# Altium PCB JLC_output.pcbdoc
Units mil, origin at the board's own origin, x right, y up, seen from the top; angles counter-clockwise.
Board outline 3167.4 x 2980 mil, 2 copper layers (Top Layer, Bottom Layer), stack 62.2 mil thick; 55 components, 65 nets, 221 pads, 30 vias.
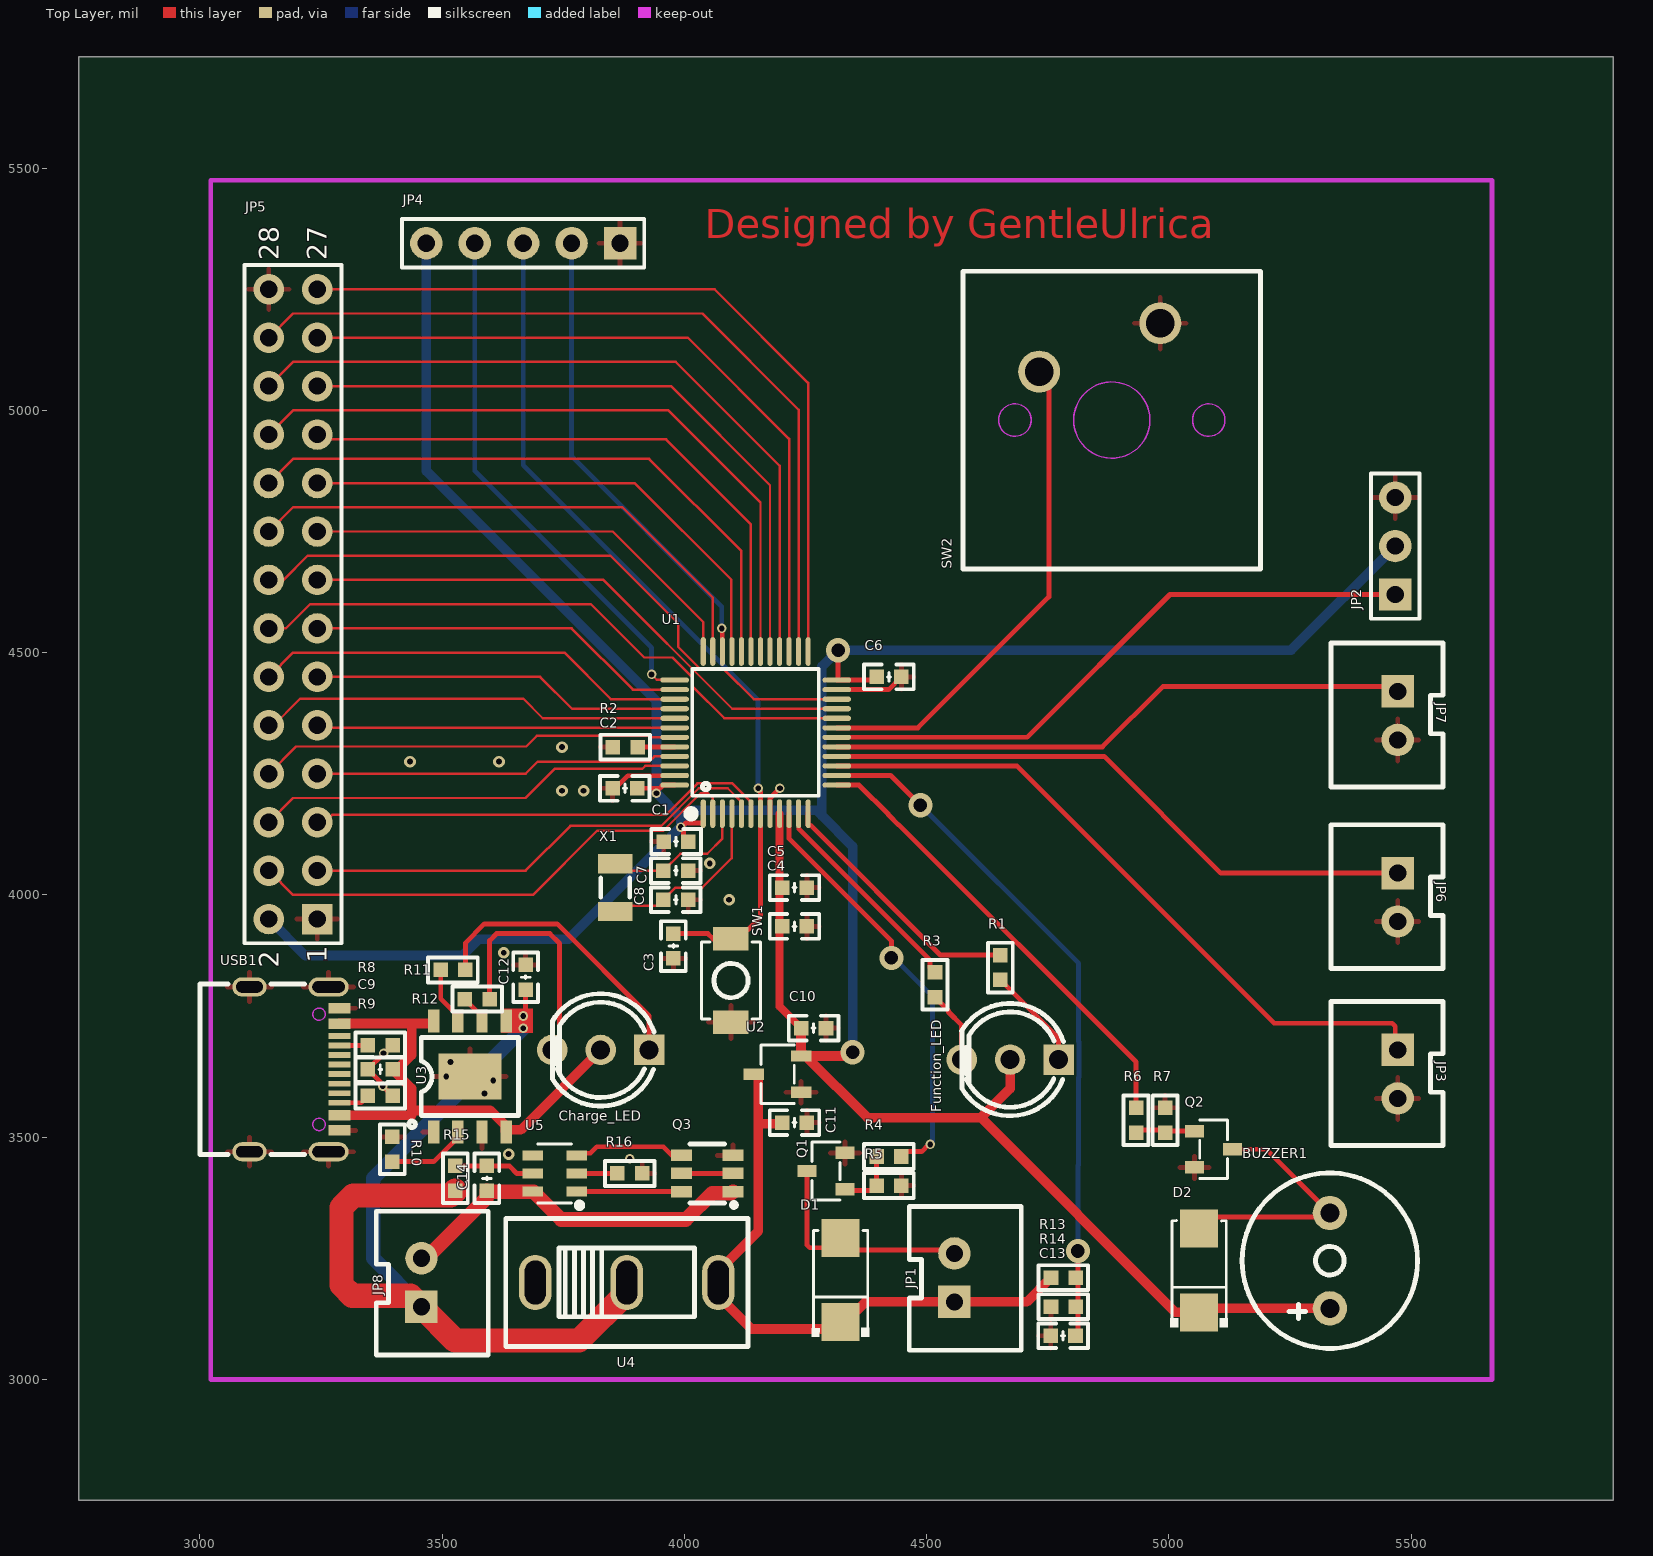
[diagram p0: Top Layer view]
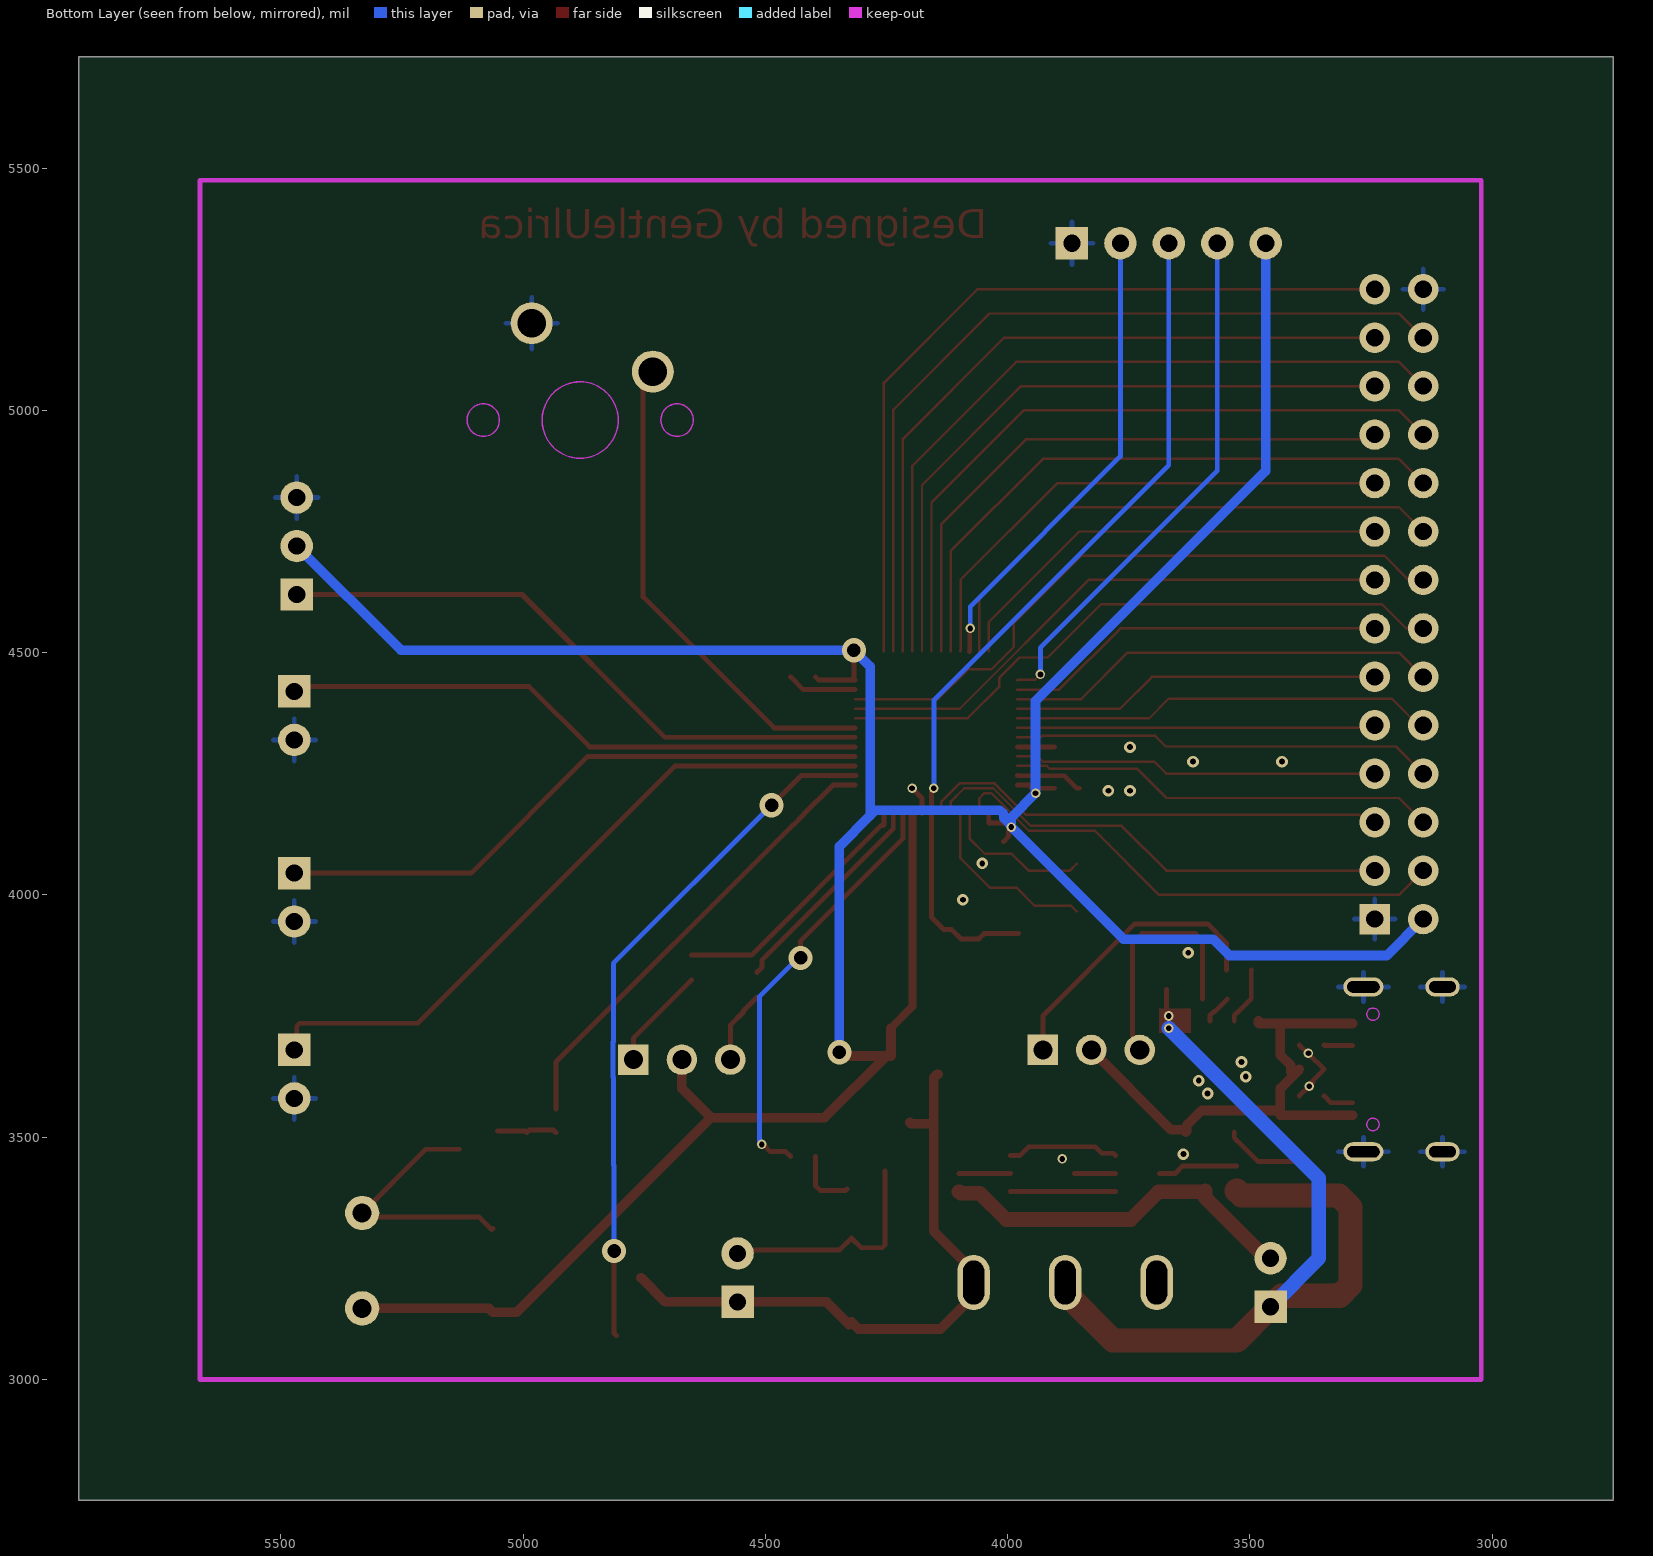
[diagram p1: Bottom Layer view, seen from below]

## Layer stack, top to bottom
Top Solder Mask Layer: solder mask 0.4, Dk 3.3
Top Layer: signal copper 1.4
Dielectric1: surface 59.4, FR4, Dk 4.5
Bottom Layer: signal copper 1.4
Bottom Solder Mask Layer: solder mask 0.4, Dk 3.3

## Board outline
5917.4,2750 2750,2750 2750,5730 5917.4,5730

## Design rules (kind name [scope] priority, off if disabled: settings)
BoardOutlineClearance copperThickness1oz [All] p0: genericclearance=10 ignorepadtopadclearanceinfootprint=FALSE except(0: Arc-SplitContinuation Track-SplitContinuation SMDPad-SplitContinuation THPad-SplitContinuation Via-SplitContinuation Fill-SplitContinuation Poly-SplitContinuation Region-SplitContinuation Text-SplitContinuation)
BoardOutlineClearance copperThickness2oz [All] p0: genericclearance=10 ignorepadtopadclearanceinfootprint=FALSE except(0: Arc-SplitContinuation Track-SplitContinuation SMDPad-SplitContinuation THPad-SplitContinuation Via-SplitContinuation Fill-SplitContinuation Poly-SplitContinuation Region-SplitContinuation Text-SplitContinuation)
BoardOutlineClearance otherClearance [All] p0: genericclearance=10 ignorepadtopadclearanceinfootprint=FALSE except(0: Arc-SplitContinuation Track-SplitContinuation SMDPad-SplitContinuation THPad-SplitContinuation Via-SplitContinuation Fill-SplitContinuation Poly-SplitContinuation Region-SplitContinuation Text-SplitContinuation)
Clearance copperThickness1oz [All] p1: gap=7 ignorepadtopadclearanceinfootprint=FALSE
Clearance copperThickness2oz [All] p1: gap=7 ignorepadtopadclearanceinfootprint=FALSE
Clearance otherClearance [All] p1: gap=7 ignorepadtopadclearanceinfootprint=FALSE
DiffPairsRouting differentialPair [All] p1: maxuncoupledlength=10 minlimit=6 maxlimit=Infinity mostfreqgap=6 toplayer_minwidth=5 toplayer_prefwidth=10 toplayer_maxwidth=100 bottomlayer_minwidth=5 bottomlayer_prefwidth=10 bottomlayer_maxwidth=100
PasteMaskExpansion pasteMaskExpansion [All] p1: expansion=0
PlaneConnect innerPlane [All] p1: planeconnectstyle=Relief reliefexpansion=20 reliefentries=4 reliefconductorwidth=10 reliefairgap=10
PolygonConnect copperRegion [All] p1: connectstyle=Relief reliefentries=4 reliefconductorwidth=10 polygonreliefangle="90 Angle" airgapwidth=10
RoutingVias viaSize [All] p1: viastyle="Through Hole" holewidth=12.0078 minholewidth=11.811 maxholewidth=248.0314 width=12.0078 minwidth=11.811 maxwidth=248.0314
SolderMaskExpansion solderMaskExpansion [IsVia] p1: useseparateexpansions=TRUE expansion=-1000 expansionbottom=-1000
SolderMaskExpansion solderMaskExpansion [All] p2: useseparateexpansions=TRUE expansion=2 expansionbottom=2
Width copperThickness1oz [All] p1: maxlimit=100 minlimit=5 preferedwidth=10
Width copperThickness2oz [All] p1: maxlimit=100 minlimit=8 preferedwidth=10

## Components (designator, comment, footprint, x,y, rotation, side; value= is the part's Value field where it differs from the comment)
BUZZER1 "hnb09a03" BUZ-TH_BD9.0-P5.00-D0.6-FD 5332.4,3245 r90 top
C1 "4.7uF" "C 0603_L"#1 3983,4110 r0 top
C2 "100nF" "C 0603_L"#2 3877.4,4220 r180 top
C3 "100nF" "C 0603_L"#2 3977.4,3894.4 r90 top
C4 "1uF" "C 0603_L"#2 4227.4,3935 r180 top
C5 "10nF" "C 0603_L"#2 4227.4,4015 r180 top
C6 "100nF" "C 0603_L"#2 4422.4,4450 r180 top
C7 "DNP" "C 0603_L"#2 3982.4,4050 r180 top
C8 "DNP" "C 0603_L"#2 3982.4,3990 r180 top
C9 "10uF" "C 0603_L"#2 3372.4,3640 r0 top
C10 "1uF" "C 0603_L"#2 4266.8,3725 r180 top
C11 "1uF" "C 0603_L"#2 4227.4,3530 r180 top
C12 "10uF" "C 0603_L"#2 3672.4,3830 r270 top
C13 "100nF" "C 0603_L"#2 4781.8,3090 r0 top
C14 "100nF" "C 0603_L"#2 3592.4,3415 r270 top
Charge_LED "tj-l5fytxhtcylc2r2g-a5" LED-TH_3P-BD5.9-P2.54-BI 3827.4,3680 r180 top
D1 "ss14_c83852" SMA_L4.3-W2.6-LS5.2-RD 4322.4,3205 r90 top
D2 "ss14_c83852" SMA_L4.3-W2.6-LS5.2-RD 5062.4,3225 r90 top
Function_LED "tj-l5fytxhtcylc2r2g-a5" LED-TH_3P-BD5.9-P2.54-BI 4672.4,3660 r180 top
JP1 "HDR-1X2" XH2.54-LI-2P 4557.4,3210 r90 top
JP2 "HDR-1X3" HDR2.54-LI-3P 5467.4,4720 r90 top
JP3 "HDR-1X2" XH2.54-LI-2P 5472.4,3630 r270 top
JP4 "HDR-1X5" HDR2.54-LI-5P 3667.4,5345 r180 top
JP5 "Header 2X11" HDR2.54-LI-2x14P 3192.4,4600 r90 top
JP6 "HDR-1X2" XH2.54-LI-2P 5472.4,3995 r270 top
JP7 "HDR-1X2" XH2.54-LI-2P 5472.4,4370 r270 top
JP8 "HDR-1X2" XH2.54-LI-2P 3457.4,3200 r90 top
Q1 "ao3400a_c347475" SOT-23-3_L2.9-W1.3-P1.90-LS2.4-BR#1 4292.4,3430 r0 top
Q2 "ao3400a_c347475" SOT-23-3_L2.9-W1.3-P1.90-LS2.4-BR#2 5092.4,3475 r180 top
Q3 "fs8205a" SOT-23-6_L2.9-W1.6-P0.95-LS2.8-BR 4047.4,3425 r0 top
R1 "1K" "R 0603_L"#1 4652.4,3850 r90 top
R2 "10K" "R 0603_L"#2 3878,4305 r180 top
R3 "1K" "R 0603_L"#1 4517.4,3814.4 r90 top
R4 "100" "R 0603_L"#1 4422.4,3460 r180 top
R5 "10K" "R 0603_L"#1 4422.4,3400 r180 top
R6 "100" "R 0603_L"#1 4932.4,3535 r90 top
R7 "10K" "R 0603_L"#1 4992.4,3535 r270 top
R8 "5.1K" "R 0603_L"#1 3372.4,3690 r180 top
R9 "5.1K" "R 0603_L"#1 3372.4,3585 r180 top
R10 "2.4K" "R 0603_L"#1 3397.4,3475 r270 top
R11 "2.2K" "R 0603_L"#1 3522.4,3845 r180 top
R12 "2.2K" "R 0603_L"#1 3572.4,3785 r180 top
R13 "1M" "R 0603_L"#1 4782.4,3210 r180 top
R14 "1M" "R 0603_L"#1 4782.4,3150 r0 top
R15 "100" "R 0603_L"#1 3527.4,3415 r90 top
R16 "1K" "R 0603_L"#1 3887.4,3425 r180 top
SW1 "ts-1088-ar02016" SW-SMD_L3.9-W3.0-P4.45 4096.3,3823.2 r90 top
SW2 "mx1a-11nw" SW-TH_MX1A-11NW 4857.4,5130 r0 top
U1 "stm32f031c6t6" LQFP-48_L7.0-W7.0-P0.50-LS9.0-BL 4147.4,4335 r0 top locked
U2 "xc6206p332mr-g_c5446" SOT-23-3_L2.9-W1.6-P1.90-LS2.8-BR 4192.4,3630 r0 top
U3 "tp4056_c382139" ESOP-8_L4.9-W3.9-P1.27-LS6.0-BL-EP 3557.4,3625 r0 top
U4 "hx ss12d10g5" SW-TH_3P-P4.80-HX-SS12D10G4 3881.3,3200 r0 top
U5 "dw01a_c351410" SOT-23-6_L2.9-W1.6-P0.95-LS2.8-BL 3732.4,3425 r90 top
USB1 "typec-16p_c53207138" USB-C-SMD_TYPEC-16P_C53207138 3195.4,3639.9 r270 top
X1 "q13fc13500004_c32346" FC-135R_L3.2-W1.5 3857.4,4015 r270 top

## Footprints (in the part's own frame and the unit in brackets; to place one, negate y for a bottom-side part, rotate by r counter-clockwise, add the part's x,y. Pads: shape width x height; smd on the part's side, far side on the other; paste and mask are expansions set on the pad)
BUZ-TH_BD9.0-P5.00-D0.6-FD [mil]
  round 70.9 hole 39.4: 1(-98.4,0) 2(98.4,0)
  silkscreen extent -181,-181 181,181
"C 0603_L"#1 [mil]
  rect 30x30 smd: 1(-25.6,0) 2(25.5,0)
  silkscreen extent -51,-26 51,26
"C 0603_L"#2 [mil]
  rect 30x30 smd: 1(-25.6,0) 2(25.6,0)
  silkscreen extent -51,-26 51,26
ESOP-8_L4.9-W3.9-P1.27-LS6.0-BL-EP [mil]
  rect 23.6x47.2 smd: 1(-75,-114.5) 2(-25,-114.5) 3(25,-114.5) 4(75,-114.5) 5(75,114.5) 6(25,114.5) 7(-25,114.5) 8(-75,114.5)
  rect 129.9x94.5 smd: 9(0,0)
  silkscreen extent -126,-105 100,81
FC-135R_L3.2-W1.5 [mil]
  rect 39.4x70.9 smd: 1(-49.2,0) 2(49.2,0)
  silkscreen extent -20,-30 20,30
HDR2.54-LI-2x14P [mil]
  rect 63x63 hole 35.4: 1(-650,-50)
  round 63 hole 35.4: 2(-650,50) 3(-550,-50) 4(-550,50) 5(-450,-50) 6(-450,50) 7(-350,-50) 8(-350,50) 9(-250,-50) 10(-250,50) 11(-150,-50) 12(-150,50) 13(-50,-50) 14(-50,50) 15(50,-50) 16(50,50) 17(150,-50) 18(150,50) 19(250,-50) 20(250,50) 21(350,-50) 22(350,50) 23(450,-50) 24(450,50) 25(550,-50) 26(550,50) 27(650,-50) 28(650,50)
  silkscreen extent -700,-100 700,100
HDR2.54-LI-3P [mil]
  rect 66.9x66.9 hole 35.4: 1(-100,0)
  round 66.9 hole 35.4: 2(0,0) 3(100,0)
  silkscreen extent -150,-50 150,50
HDR2.54-LI-5P [mil]
  rect 66.9x66.9 hole 35.4: 1(-200,0)
  round 66.9 hole 35.4: 2(-100,0) 3(0,0) 4(100,0) 5(200,0)
  silkscreen extent -250,-50 250,50
LED-TH_3P-BD5.9-P2.54-BI [mil]
  rect 63x63 hole 39.4: 1(-100,0)
  round 63 hole 39.4: 2(0,0) 3(100,0)
  silkscreen extent -110,-116 100,116
LQFP-48_L7.0-W7.0-P0.50-LS9.0-BL [mil]
  oval 10.6x59.1 smd paste+0 mask+2: 1(-108.3,-167.3) 2(-88.6,-167.3) 3(-68.9,-167.3) 4(-49.2,-167.3) 5(-29.6,-167.3) 6(-9.9,-167.3) 7(9.8,-167.3) 8(29.5,-167.3) 9(49.2,-167.3) 10(68.9,-167.3) 11(88.5,-167.3) 12(108.2,-167.3) 25(108.2,167.3) 26(88.5,167.3) 27(68.9,167.3) 28(49.2,167.3) 29(29.5,167.3) 30(9.8,167.3) 31(-9.9,167.3) 32(-29.6,167.3) 33(-49.2,167.3) 34(-68.9,167.3) 35(-88.6,167.3) 36(-108.3,167.3)
  oval 59.1x10.6 smd paste+0 mask+2: 13(167.3,-108.3) 14(167.3,-88.6) 15(167.3,-68.9) 16(167.3,-49.2) 17(167.3,-29.5) 18(167.3,-9.8) 19(167.3,9.8) 20(167.3,29.5) 21(167.3,49.2) 22(167.3,68.9) 23(167.3,88.6) 24(167.3,108.3) 37(-167.4,108.3) 38(-167.4,88.6) 39(-167.4,68.9) 40(-167.4,49.2) 41(-167.4,29.5) 42(-167.4,9.8) 43(-167.4,-9.8) 44(-167.4,-29.5) 45(-167.4,-49.2) 46(-167.4,-68.9) 47(-167.4,-88.6) 48(-167.4,-108.3)
  silkscreen extent -141,-176 130,132
"R 0603_L"#1 [mil]
  rect 30x30 smd: 1(-25.6,0) 2(25.6,0)
  silkscreen extent -51,-26 51,26
"R 0603_L"#2 [mil]
  rect 30x30 smd: 1(-25.5,0) 2(25.6,0)
  silkscreen extent -51,-26 51,26
SMA_L4.3-W2.6-LS5.2-RD [mil]
  rect 78.7x78.7 smd: 1(-86.6,0) 2(86.6,0)
  silkscreen extent -117,-59 102,59
SOT-23-3_L2.9-W1.3-P1.90-LS2.4-BR#1 [mil]
  rect 39.4x25.6 smd: 1(39.3,-37.4) 2(39.3,37.4) 3(-39.4,0)
  silkscreen extent -29,-60 29,60
SOT-23-3_L2.9-W1.3-P1.90-LS2.4-BR#2 [mil]
  rect 39.4x25.6 smd: 1(39.4,-37.4) 2(39.4,37.4) 3(-39.3,0)
  silkscreen extent -29,-60 29,60
SOT-23-3_L2.9-W1.6-P1.90-LS2.8-BR [mil]
  rect 42.1x23.6 smd: 1(48.6,-37.4) 2(48.6,37.4) 3(-48.7,0)
  silkscreen extent -34,-60 34,60
SOT-23-6_L2.9-W1.6-P0.95-LS2.8-BL [mil]
  rect 20.9x42.2 smd: 1(-37.4,-45.2) 2(0,-45.2) 3(37.4,-45.2) 4(37.4,45.3) 5(0,45.3) 6(-37.4,45.3)
  silkscreen extent -72,-57 61,35
SOT-23-6_L2.9-W1.6-P0.95-LS2.8-BR [mil]
  rect 43.3x23.6 smd paste+0 mask+2: 1(53.1,-37.4) 2(53.1,0) 3(53.1,37.4) 4(-53.2,37.4) 5(-53.2,0) 6(-53.2,-37.4)
  silkscreen extent -36,-70 60,61
SW-SMD_L3.9-W3.0-P4.45 [mil]
  rect 48.4x73.2 smd: 1(-86,0) 2(86,0)
  silkscreen extent -80,-61 80,61
SW-TH_3P-P4.80-HX-SS12D10G4 [mil]
  oval 66.9x114.2 hole 43.3 slot 90.6 at 90 deg paste-99999 mask+2: 1(-188.9,0) 2(0,0) 3(189,0)
  silkscreen extent -250,-132 250,132
SW-TH_MX1A-11NW [mil]
  round 86.6 hole 59.1 paste-99999 mask+2: 1(-125,-50) 2(125,50)
  Board Outline Layer circle w0.1: c25,-150 r78.7
  Board Outline Layer circle w0.1: c-175,-150 r33.5
  Board Outline Layer circle w0.1: c225,-150 r33.5
  Board Outline Layer lines w0.1: -208.5,-154.4 -206.3,-162.9 -201.8,-170.6 -195.6,-176.8 -188,-181.2 -179.4,-183.5 -170.6,-183.5 -162.1,-181.2 -154.5,-176.8 -148.2,-170.6 -143.8,-162.9 -141.5,-154.4 -141.5,-150 -141.5,-145.6 -143.8,-137.1 -148.2,-129.4 -154.5,-123.2 -162.1,-118.8 -170.6,-116.5 -179.4,-116.5 -188,-118.8 -195.6,-123.2 -201.8,-129.4 -206.3,-137.1 -208.5,-145.6 -208.5,-150 -208.5,-154.4 ; -53.7,-157.8 -50.7,-173 -44.8,-187.3 -36.2,-200.2 -25.2,-211.1 -12.3,-219.7 2,-225.7 17.2,-228.7 32.7,-228.7 47.9,-225.7 62.2,-219.7 75.1,-211.1 86.1,-200.2 94.7,-187.3 100.6,-173 103.7,-157.8 103.7,-150 103.7,-142.2 100.6,-127 94.7,-112.7 86.1,-99.8 75.1,-88.9 62.2,-80.3 47.9,-74.3 32.7,-71.3 17.2,-71.3 2,-74.3 -12.3,-80.3 -25.2,-88.9 -36.2,-99.8 -44.8,-112.7 -50.7,-127 -53.7,-142.2 -53.7,-150 -53.7,-157.8 ; 191.5,-154.4 193.7,-162.9 198.2,-170.6 204.4,-176.8 212,-181.2 220.6,-183.5 229.4,-183.5 237.9,-181.2 245.5,-176.8 251.8,-170.6 256.2,-162.9 258.5,-154.4 258.5,-150 258.5,-145.6 256.2,-137.1 251.8,-129.4 245.5,-123.2 237.9,-118.8 229.4,-116.5 220.6,-116.5 212,-118.8 204.4,-123.2 198.2,-129.4 193.7,-137.1 191.5,-145.6 191.5,-150 191.5,-154.4
  Board Outline Layer region: 103.7,-150 103.7,-157.8 100.6,-173 94.7,-187.3 86.1,-200.2 75.1,-211.1 62.2,-219.7 47.9,-225.7 32.7,-228.7 17.2,-228.7 2,-225.7 -12.3,-219.7 -25.2,-211.1 -36.2,-200.2 -44.8,-187.3 -50.7,-173 -53.7,-157.8 -53.7,-150 -53.7,-142.2 -50.7,-127 -44.8,-112.7 -36.2,-99.8 -25.2,-88.9 -12.3,-80.3 2,-74.3 17.2,-71.3 32.7,-71.3 47.9,-74.3 62.2,-80.3 75.1,-88.9 86.1,-99.8 94.7,-112.7 100.6,-127 103.7,-142.2
  Board Outline Layer region: 103.7,-150 103.7,-157.8 100.6,-173 94.7,-187.3 86.1,-200.2 75.1,-211.1 62.2,-219.7 47.9,-225.7 32.7,-228.7 17.2,-228.7 2,-225.7 -12.3,-219.7 -25.2,-211.1 -36.2,-200.2 -44.8,-187.3 -50.7,-173 -53.7,-157.8 -53.7,-150 -53.7,-142.2 -50.7,-127 -44.8,-112.7 -36.2,-99.8 -25.2,-88.9 -12.3,-80.3 2,-74.3 17.2,-71.3 32.7,-71.3 47.9,-74.3 62.2,-80.3 75.1,-88.9 86.1,-99.8 94.7,-112.7 100.6,-127 103.7,-142.2
  Board Outline Layer region: -141.5,-150 -141.5,-154.4 -143.8,-162.9 -148.2,-170.6 -154.5,-176.8 -162.1,-181.2 -170.6,-183.5 -179.4,-183.5 -188,-181.2 -195.6,-176.8 -201.8,-170.6 -206.3,-162.9 -208.5,-154.4 -208.5,-150 -208.5,-145.6 -206.3,-137.1 -201.8,-129.4 -195.6,-123.2 -188,-118.8 -179.4,-116.5 -170.6,-116.5 -162.1,-118.8 -154.5,-123.2 -148.2,-129.4 -143.8,-137.1 -141.5,-145.6
  Board Outline Layer region: -141.5,-150 -141.5,-154.4 -143.8,-162.9 -148.2,-170.6 -154.5,-176.8 -162.1,-181.2 -170.6,-183.5 -179.4,-183.5 -188,-181.2 -195.6,-176.8 -201.8,-170.6 -206.3,-162.9 -208.5,-154.4 -208.5,-150 -208.5,-145.6 -206.3,-137.1 -201.8,-129.4 -195.6,-123.2 -188,-118.8 -179.4,-116.5 -170.6,-116.5 -162.1,-118.8 -154.5,-123.2 -148.2,-129.4 -143.8,-137.1 -141.5,-145.6
  Board Outline Layer region: 258.5,-150 258.5,-154.4 256.2,-162.9 251.8,-170.6 245.5,-176.8 237.9,-181.2 229.4,-183.5 220.6,-183.5 212,-181.2 204.4,-176.8 198.2,-170.6 193.7,-162.9 191.5,-154.4 191.5,-150 191.5,-145.6 193.7,-137.1 198.2,-129.4 204.4,-123.2 212,-118.8 220.6,-116.5 229.4,-116.5 237.9,-118.8 245.5,-123.2 251.8,-129.4 256.2,-137.1 258.5,-145.6
  Board Outline Layer region: 258.5,-150 258.5,-154.4 256.2,-162.9 251.8,-170.6 245.5,-176.8 237.9,-181.2 229.4,-183.5 220.6,-183.5 212,-181.2 204.4,-176.8 198.2,-170.6 193.7,-162.9 191.5,-154.4 191.5,-150 191.5,-145.6 193.7,-137.1 198.2,-129.4 204.4,-123.2 212,-118.8 220.6,-116.5 229.4,-116.5 237.9,-118.8 245.5,-123.2 251.8,-129.4 256.2,-137.1 258.5,-145.6
  Board Outline Layer region: 103.7,-150 103.7,-157.8 100.6,-173 94.7,-187.3 86.1,-200.2 75.1,-211.1 62.2,-219.7 47.9,-225.7 32.7,-228.7 17.2,-228.7 2,-225.7 -12.3,-219.7 -25.2,-211.1 -36.2,-200.2 -44.8,-187.3 -50.7,-173 -53.7,-157.8 -53.7,-150 -53.7,-142.2 -50.7,-127 -44.8,-112.7 -36.2,-99.8 -25.2,-88.9 -12.3,-80.3 2,-74.3 17.2,-71.3 32.7,-71.3 47.9,-74.3 62.2,-80.3 75.1,-88.9 86.1,-99.8 94.7,-112.7 100.6,-127 103.7,-142.2
  Board Outline Layer region: -141.5,-150 -141.5,-154.4 -143.8,-162.9 -148.2,-170.6 -154.5,-176.8 -162.1,-181.2 -170.6,-183.5 -179.4,-183.5 -188,-181.2 -195.6,-176.8 -201.8,-170.6 -206.3,-162.9 -208.5,-154.4 -208.5,-150 -208.5,-145.6 -206.3,-137.1 -201.8,-129.4 -195.6,-123.2 -188,-118.8 -179.4,-116.5 -170.6,-116.5 -162.1,-118.8 -154.5,-123.2 -148.2,-129.4 -143.8,-137.1 -141.5,-145.6
  Board Outline Layer region: 258.5,-150 258.5,-154.4 256.2,-162.9 251.8,-170.6 245.5,-176.8 237.9,-181.2 229.4,-183.5 220.6,-183.5 212,-181.2 204.4,-176.8 198.2,-170.6 193.7,-162.9 191.5,-154.4 191.5,-150 191.5,-145.6 193.7,-137.1 198.2,-129.4 204.4,-123.2 212,-118.8 220.6,-116.5 229.4,-116.5 237.9,-118.8 245.5,-123.2 251.8,-129.4 256.2,-137.1 258.5,-145.6
  Board Outline Layer region: 103.7,-150 103.3,-157.7 102.2,-165.4 100.3,-172.9 97.7,-180.1 94.4,-187.1 90.4,-193.7 85.8,-200 80.6,-205.7 74.9,-210.9 68.7,-215.5 62.1,-219.4 55.1,-222.7 47.8,-225.3 40.3,-227.2 32.7,-228.4 25,-228.7 17.2,-228.4 9.6,-227.2 2.1,-225.3 -5.2,-222.7 -12.2,-219.4 -18.8,-215.5 -25,-210.9 -30.7,-205.7 -35.9,-200 -40.5,-193.7 -44.5,-187.1 -47.8,-180.1 -50.4,-172.9 -52.3,-165.4 -53.4,-157.7 -53.8,-150 -53.4,-142.3 -52.3,-134.6 -50.4,-127.1 -47.8,-119.9 -44.5,-112.9 -40.5,-106.3 -35.9,-100 -30.7,-94.3 -25,-89.1 -18.8,-84.5 -12.2,-80.6 -5.2,-77.3 2.1,-74.7 9.6,-72.8 17.2,-71.6 25,-71.3 32.7,-71.6 40.3,-72.8 47.8,-74.7 55.1,-77.3 62.1,-80.6 68.7,-84.5 74.9,-89.1 80.6,-94.3 85.8,-100 90.4,-106.3 94.4,-112.9 97.7,-119.9 100.3,-127.1 102.2,-134.6 103.3,-142.3
  Board Outline Layer region: -141.5,-150 -141.9,-155 -143,-159.9 -144.9,-164.5 -147.4,-168.9 -150.5,-172.8 -154.1,-176.2 -158.3,-179 -162.8,-181.2 -167.6,-182.7 -172.5,-183.4 -177.5,-183.4 -182.5,-182.7 -187.3,-181.2 -191.8,-179 -195.9,-176.2 -199.6,-172.8 -202.7,-168.9 -205.2,-164.5 -207,-159.9 -208.2,-155 -208.5,-150 -208.2,-145 -207,-140.1 -205.2,-135.5 -202.7,-131.1 -199.6,-127.2 -195.9,-123.8 -191.8,-121 -187.3,-118.8 -182.5,-117.3 -177.5,-116.6 -172.5,-116.6 -167.6,-117.3 -162.8,-118.8 -158.3,-121 -154.1,-123.8 -150.5,-127.2 -147.4,-131.1 -144.9,-135.5 -143,-140.1 -141.9,-145
  Board Outline Layer region: 258.5,-150 258.1,-155 257,-159.9 255.1,-164.5 252.6,-168.9 249.5,-172.8 245.9,-176.2 241.7,-179 237.2,-181.2 232.4,-182.7 227.5,-183.4 222.5,-183.4 217.5,-182.7 212.7,-181.2 208.2,-179 204.1,-176.2 200.4,-172.8 197.3,-168.9 194.8,-164.5 193,-159.9 191.8,-155 191.5,-150 191.8,-145 193,-140.1 194.8,-135.5 197.3,-131.1 200.4,-127.2 204.1,-123.8 208.2,-121 212.7,-118.8 217.5,-117.3 222.5,-116.6 227.5,-116.6 232.4,-117.3 237.2,-118.8 241.7,-121 245.9,-123.8 249.5,-127.2 252.6,-131.1 255.1,-135.5 257,-140.1 258.1,-145
  Board Outline Layer region: 103.7,-150 95.91,-184.15 74.07,-211.53 42.51,-226.73 7.49,-226.73 -24.07,-211.53 -45.91,-184.15 -53.7,-150 -53.8,-150 -45.91,-115.85 -24.07,-88.47 7.49,-73.27 42.51,-73.27 74.07,-88.47 95.91,-115.85 103.7,-150
  Board Outline Layer region: -141.5,-150 -144.82,-164.54 -154.11,-176.19 -167.55,-182.66 -182.45,-182.66 -195.89,-176.19 -205.18,-164.54 -208.5,-150 -208.5,-150 -205.18,-135.46 -195.89,-123.81 -182.45,-117.34 -167.55,-117.34 -154.11,-123.81 -144.82,-135.46 -141.5,-150
  Board Outline Layer region: 258.5,-150 255.18,-164.54 245.89,-176.19 232.45,-182.66 217.55,-182.66 204.11,-176.19 194.82,-164.54 191.5,-150 191.5,-150 194.82,-135.46 204.11,-123.81 217.55,-117.34 232.45,-117.34 245.89,-123.81 255.18,-135.46 258.5,-150
  silkscreen extent -282,-457 332,157
USB-C-SMD_TYPEC-16P_C53207138 [mil]
  oval 39.4x82.7 hole 23.6 slot 66.9 at 90 deg paste-99999 mask+2: 12(-170.1,70.3) 13(170.1,70.3)
  oval 39.4x70.9 hole 23.6 slot 55.1 at 90 deg paste-99999 mask+2: 14(-170.1,-93) 15(170.1,-93)
  rect 11.8x45.3 smd paste-3937 mask+2: A5(-49.2,93) A6(-9.9,93) A7(9.8,93) A8(49.2,93) B5(68.9,93) B6(29.5,93) B7(-29.6,93) B8(-68.9,93)
  rect 21.7x45.3 smd paste-3937 mask+2: A9B4(94.5,93) A12B1(126,93) B9A4(-94.5,93) B12A1(-126,93)
  Board Outline Layer circle w0.1: c-113.8,50.7 r12.8
  Board Outline Layer circle w0.1: c113.8,50.7 r12.8
  Board Outline Layer lines w0.1: 116.3,37.9 121,39.8 124.6,43.4 126.6,48.1 126.6,50.7 126.6,53.2 124.6,57.9 121,61.5 116.3,63.5 111.2,63.5 106.5,61.5 102.9,57.9 101,53.2 101,50.7 101,48.1 102.9,43.4 106.5,39.8 111.2,37.9 116.3,37.9 ; -111.3,37.9 -106.5,39.8 -102.9,43.4 -101,48.1 -101,50.7 -101,53.2 -102.9,57.9 -106.5,61.5 -111.3,63.5 -116.3,63.5 -121.1,61.5 -124.7,57.9 -126.6,53.2 -126.6,50.7 -126.6,48.1 -124.7,43.4 -121.1,39.8 -116.3,37.9 -111.3,37.9
  Board Outline Layer region: -101,50.7 -101,48.1 -102.9,43.4 -106.5,39.8 -111.3,37.9 -116.3,37.9 -121.1,39.8 -124.7,43.4 -126.6,48.1 -126.6,50.7 -126.6,53.2 -124.7,57.9 -121.1,61.5 -116.3,63.5 -111.3,63.5 -106.5,61.5 -102.9,57.9 -101,53.2
  Board Outline Layer region: -101,50.7 -101,48.1 -102.9,43.4 -106.5,39.8 -111.3,37.9 -116.3,37.9 -121.1,39.8 -124.7,43.4 -126.6,48.1 -126.6,50.7 -126.6,53.2 -124.7,57.9 -121.1,61.5 -116.3,63.5 -111.3,63.5 -106.5,61.5 -102.9,57.9 -101,53.2
  Board Outline Layer region: 126.6,50.7 126.6,48.1 124.6,43.4 121,39.8 116.3,37.9 111.2,37.9 106.5,39.8 102.9,43.4 101,48.1 101,50.7 101,53.2 102.9,57.9 106.5,61.5 111.2,63.5 116.3,63.5 121,61.5 124.6,57.9 126.6,53.2
  Board Outline Layer region: 126.6,50.7 126.6,48.1 124.6,43.4 121,39.8 116.3,37.9 111.2,37.9 106.5,39.8 102.9,43.4 101,48.1 101,50.7 101,53.2 102.9,57.9 106.5,61.5 111.2,63.5 116.3,63.5 121,61.5 124.6,57.9 126.6,53.2
  Board Outline Layer region: -101,50.7 -101,48.1 -102.9,43.4 -106.5,39.8 -111.3,37.9 -116.3,37.9 -121.1,39.8 -124.7,43.4 -126.6,48.1 -126.6,50.7 -126.6,53.2 -124.7,57.9 -121.1,61.5 -116.3,63.5 -111.3,63.5 -106.5,61.5 -102.9,57.9 -101,53.2
  Board Outline Layer region: 126.6,50.7 126.6,48.1 124.6,43.4 121,39.8 116.3,37.9 111.2,37.9 106.5,39.8 102.9,43.4 101,48.1 101,50.7 101,53.2 102.9,57.9 106.5,61.5 111.2,63.5 116.3,63.5 121,61.5 124.6,57.9 126.6,53.2
  Board Outline Layer region: -101,50.7 -101.4,47.6 -102.5,44.7 -104.2,42.2 -106.5,40.1 -109.3,38.7 -112.3,38 -115.3,38 -118.3,38.7 -121.1,40.1 -123.4,42.2 -125.1,44.7 -126.2,47.6 -126.6,50.7 -126.2,53.7 -125.1,56.6 -123.4,59.1 -121.1,61.2 -118.3,62.6 -115.3,63.4 -112.3,63.4 -109.3,62.6 -106.5,61.2 -104.2,59.1 -102.5,56.6 -101.4,53.7
  Board Outline Layer region: 126.6,50.7 126.2,47.6 125.1,44.7 123.3,42.2 121,40.1 118.3,38.7 115.3,38 112.2,38 109.2,38.7 106.5,40.1 104.2,42.2 102.4,44.7 101.3,47.6 101,50.7 101.3,53.7 102.4,56.6 104.2,59.1 106.5,61.2 109.2,62.6 112.2,63.4 115.3,63.4 118.3,62.6 121,61.2 123.3,59.1 125.1,56.6 126.2,53.7
  Board Outline Layer region: -113.8,63.5 -108.25,62.23 -103.79,58.68 -101.32,53.55 -101.32,47.85 -103.79,42.72 -108.25,39.17 -113.8,37.9 -113.8,37.9 -119.35,39.17 -123.81,42.72 -126.28,47.85 -126.28,53.55 -123.81,58.68 -119.35,62.23 -113.8,63.5
  Board Outline Layer region: 113.8,63.5 119.35,62.23 123.81,58.68 126.28,53.55 126.28,47.85 123.81,42.72 119.35,39.17 113.8,37.9 113.8,37.9 108.25,39.17 103.79,42.72 101.32,47.85 101.32,53.55 103.79,58.68 108.25,62.23 113.8,63.5
  silkscreen extent -176,-195 176,21
XH2.54-LI-2P [mil]
  rect 66.9x66.9 hole 35.4: 1(-50,0)
  round 66.9 hole 35.4: 2(50,0)
  silkscreen extent -150,-138 147,93

## Via types
v1: diameter 24, hole 12, Top Layer to Bottom Layer, 13 vias
v2: diameter 19.7, hole 11.8, Top Layer to Bottom Layer, 11 vias
v3: diameter 50, hole 28, Top Layer to Bottom Layer, 5 vias
v4: diameter 19.7, hole 12, Top Layer to Bottom Layer, 1 vias

## Nets (pads, with @x,y where several pads share a name; then routed paths per layer and width w, separated by ;. In a path a pad name is that pad's centre, name@x,y a point inside that pad or via, vN(x,y) a via of type N, cw(c..) or ccw(c..) an arc to the next point about the centre after c; other vN are vias at no path point)
3V3: BUZZER1.1 C1.2 C2.1 C4.2 C5.2 C6.2 C10.2 D2.1 Function_LED.2 JP2.2 JP4.5 JP5.2 U1.1 U1.9 U1.24 U1.48 U2.2 | length 7270.1
  Top Layer w10: C2.1 3948.9,4220 3955.7,4226.7 U1.48@3956,4226.7 ; v2(3942.4,4210) 3944.2,4211.9 3944.2,4214.9 U1.48@3956,4226.7 ; U1.48 U1.48@3956,4226.7 ; C1.2 3998.5,4120 3998.5,4131.2 3992.4,4137.4 v2(3992.4,4140) 3995,4140 4003.5,4148.5 4038.8,4148.5 4039.1,4148.8 U1.1 ; U1.24 U1.24@4317.1,4443.3 ; v3(4317.4,4505) 4317.4,4443.6 U1.24@4317.1,4443.3 ; C6.2 4390,4443.3 U1.24@4317.1,4443.3
  Top Layer w16: U1.9 4196.6,3769.6 C10.2
  Top Layer w20: C10.2 4241,3724.8 U2.2 4250.2,3667.4 4377.6,3540 4612.4,3540 ; U2.2@4250.2,3668.7 4251.5,3667.4 4331.6,3667.4 4339.2,3675 v3(4347.4,3675) ; Function_LED.2 4672.4,3600 4612.4,3540 ; BUZZER1.1 5070.5,3146.6 D2.1 5062.2,3138.5 5013.9,3138.5 4612.4,3540
  Bottom Layer w20: JP5.2 3217.4,3875 3542.4,3875 3575.9,3908.5 3760.9,3908.5 v2(3992.4,4140) v2@3992.4,4142.6 ; JP4.5 3467.4,4875 3942.4,4400 v2(3942.4,4210) 3992.4,4160 v2@3992.4,4142.6 ; v3(4347.4,3675) 4347.4,4100 4283.8,4163.6 ; JP2.2 5252.4,4505 v3(4317.4,4505) 4283.8,4471.4 4283.8,4163.6 ; v2@3992.4,4142.6 4008,4158.3 4008,4166.5 4016.5,4175 4272.4,4175 4283.8,4163.6
B-: C14.2 JP8.2 Q3.1 U5.6 | length 757.7
  Top Layer w30: JP8.2 3467.4,3250 3592.4,3375 C14.2 3594.2,3387.6 U5.6 3688.7,3387.6 3746.3,3330 4003.1,3330 4057.5,3384.4 4097.3,3384.4 Q3.1
BAT+: C12.2 JP8.1 R15.1 U3.5 U4.2 | length 1909
  Top Layer w10: v2(3667.4,3750) 3672.4,3755 C12.2
  Top Layer w50: R15.1 3517.4,3379.4 3316.8,3379.4 3292.4,3355 3292.4,3195 3314.8,3172.6 3434.8,3172.6 JP8.1 3527.4,3080 3782.4,3080 3881.3,3179 U4.2
  Bottom Layer w30: JP8.1 3357.6,3249.8 3357.6,3415.2 v2(3667.4,3725)
BOOT0: R2.1 U1.44 | length 76.7
  Top Layer w10: R2.1 3955.2,4305 3955.7,4305.5 U1.44
GND: C1.1 C2.2 C3.1 C4.1 C5.1 C6.1 C7.1 C8.1 C9.1 C10.1 C11.1 C12.1 C13.1 JP2.3 JP3.2 JP4.1 JP5.1 JP5.28 JP6.2 JP7.2 Q1.2 Q2.2 Q3.3 R2.2 R5.1 R7.1 R8.1 R9.1 R10.1 R14.1 R16.1 SW1.1 SW2.2 U1.8 U1.23 U1.47 U2.1 U3.1 U3.3 U3.9 USB1.12 USB1.13 USB1.14 USB1.15 USB1.A12B1 USB1.B12A1 | length 516.8
  Top Layer w10: R9.1 v2@3377.6,3605.4 ; R8.1 3380.8,3672.9 v2(3379.3,3672.9) 3379.3,3672.5 C9.1 3377.6,3609.2 v2@3377.6,3605.4 ; C2.2 3857.4,4220 3883.4,4246 3979.6,4246 U1.47 ; U1.8 4176.9,4199.5 v4(4197.4,4220) ; U1.23 4421.5,4423.6 C6.1 ; v2@3377.6,3605.4 v2(3377.6,3605) 3369.2,3613.4 3369.2,3613.7 v2@3377.6,3605.4
  other v1: 3637.4,3465 3587.4,3590 3605.7,3616.7 3508.8,3625 3517.4,3655 3627.4,3880.5 4092.4,3990 4052.4,4065 3747.4,4215 3792.2,4215 3433.9,4275 3617.4,4275 3747.4,4305
  other v2: 3887.4,3455
MID: Q3.2 Q3.5 | length 106.3
  Top Layer w10: Q3.5 Q3.2
NETBUZZER1_2: BUZZER1.2 D2.2 Q2.3 | length 540.4
  Top Layer w10: D2.2 5064.9,3309.1 5090.8,3335 5323.9,3335 BUZZER1.2 5200.8,3475 Q2.3
NETC14_1: C14.1 R15.2 U5.5 | length 166.2
  Top Layer w10: R15.2 C14.1 3638.9,3440.6 3654.5,3425 U5.5
NETCHARGE_LED_1: Charge_LED.1 R11.1 | length 600
  Top Layer w10: R11.1 3548,3900.6 3587.4,3940 3737.4,3940 3927.4,3750 Charge_LED.1
NETCHARGE_LED_3: Charge_LED.3 R12.1 | length 505.5
  Top Layer w10: R12.1 3598,3905.6 3612.4,3920 3722.4,3920 3742.4,3900 3742.4,3709.3 3727.4,3694.3 Charge_LED.3
NETFUNCTION_LED_1: Function_LED.1 R1.1 | length 214.1
  Top Layer w10: R1.1 4772.4,3704.4 Function_LED.1
NETFUNCTION_LED_3: Function_LED.3 R3.1 | length 151.6
  Top Layer w10: R3.1 4545.2,3761 4545.2,3758.3 4572.4,3731.1 Function_LED.3
NETQ1_1: Q1.1 R4.2 R5.2 | length 130.3
  Top Layer w10: Q1.1 4334.3,3390 4386.8,3390 R5.2 R4.2
NETQ2_1: Q2.1 R6.1 R7.2 | length 126
  Top Layer w10: R6.1 4937.4,3514.4 4987.4,3514.4 R7.2 4995.3,3512.4 Q2.1
NETQ3_4: Q3.4 U5.3 | length 231.2
  Top Layer w10: U5.3 3781.8,3466.6 3806.2,3466.6 3819.6,3480 3956.8,3480 3974.4,3462.4 Q3.4
NETQ3_6: Q3.6 U5.1 | length 216.6
  Top Layer w10: U5.1 Q3.6
NETR8_2: R8.2 USB1.A5 | length 58.8
  Top Layer w10: USB1.A5 3345.9,3689.1 R8.2
NETR9_2: R9.2 USB1.B5 | length 64.2
  Top Layer w10: USB1.B5 3332.8,3571 R9.2
NETR10_2: R10.2 U3.2 | length 167.2
  Top Layer w10: R10.2 3482.8,3449.4 3525.3,3491.9 3525.6,3491.9 3532.4,3498.7 U3.2
NETR11_2: R11.2 U3.7 | length 120.4
  Top Layer w10: R11.2 3497.4,3844.4 3497.4,3786 3525.3,3758.1 3525.6,3758.1 3532.4,3751.3 U3.7
NETR12_2: R12.2 U3.6 | length 61.4
  Top Layer w10: R12.2 3573.7,3758.1 3575.6,3758.1 3582.4,3751.3 U3.6
NETR16_2: R16.2 U5.2 | length 84.2
  Top Layer w10: U5.2 R16.2
NRST: C3.2 JP4.3 SW1.2 U1.7 | length 1796.6
  Top Layer w10: C3.2 4048.7,3920 4059.5,3909.2 SW1.2 4115.5,3928.4 4131.5,3928.4 4157.2,3954.1 U1.7 4157.2,4212.5 4152.4,4217.4 v2(4152.4,4220)
  Bottom Layer w10: JP4.3 3667.4,4887 4152.4,4402 v2(4152.4,4220)
PA0: R4.1 U1.10 | length 880.1
  Top Layer w10: U1.10 4216.3,4116.1 4427.4,3905 v3(4427.4,3870) ; R4.1 4458,3470 4489.7,3470 4504.7,3485 v2(4507.4,3485)
  Bottom Layer w10: v3(4427.4,3870) 4432.4,3870 4512.4,3790 4512.4,3490 v2(4507.4,3485)
PA1: R3.2 U1.11 | length 444.3
  Top Layer w10: U1.11 4236.1,4167.6 4236.1,4136.3 4507.4,3865 4507.4,3850 R3.2
PA2: R1.2 U1.12 | length 531.9
  Top Layer w10: U1.12 4255.6,4143.6 4255.9,4143.3 4261,4143.3 4528.8,3875.6 R1.2
PA3: R6.2 U1.13 | length 951.8
  Top Layer w10: U1.13 4360.6,4226.7 4421.4,4166 4421.4,4165.1 4442.5,4144 4443.3,4144 4932.4,3655 R6.2@4932.4,3558.2
PA4: C13.2 R13.1 R14.2 U1.14 | length 1433.1
  Top Layer w10: U1.14@4313.3,4246.4 4425.9,4246.4 v3(4487.4,4185) ; C13.2 4812.4,3095 v3(4812.4,3265)
  Bottom Layer w10: v3(4487.4,4185) 4813.9,3858.5 4813.9,3697 4814.8,3696 4814.8,3624 4813.9,3623 4813.9,3442.8 4812.4,3441.3 v3(4812.4,3265)
PA5: JP3.1 U1.15 | length 1425.9
  Top Layer w10: U1.15 4686.3,4266.1 5217.4,3735 5460.8,3735 5467.4,3728.5 5467.4,3685 JP3.1
PA6: JP6.1 U1.16 | length 1257.4
  Top Layer w10: U1.16 4866.6,4285.8 5107.4,4045 JP6.1
PA7: JP7.1 U1.17 | length 1213.4
  Top Layer w10: U1.17 4862.8,4305.5 4987.4,4430 5462.4,4430 JP7.1
PA8: JP5.23 U1.29 | length 1362.4
  Top Layer w5: JP5.23 3972.4,5050 4176.9,4845.5 U1.29
PA9: JP5.22 U1.30 | length 1422
  Top Layer w5: JP5.22 3192.4,5000 3967.4,5000 4157.2,4810.2 U1.30
PA10: JP5.21 U1.31 | length 1234.3
  Top Layer w5: JP5.21 3252.4,4940 3962.4,4940 4137.5,4764.8 U1.31
PA11: JP5.20 U1.32 | length 1282.2
  Top Layer w5: JP5.20 3192.4,4900 3927.4,4900 4117.8,4709.5 U1.32
PA12: JP5.19 U1.33 | length 1085.9
  Top Layer w5: JP5.19 3897.4,4850 4097.1,4650.3 4097.1,4503.4 U1.33
PA15: JP5.13 U1.38 | length 790
  Top Layer w5: JP5.13 3767.4,4550 3893.8,4423.6 U1.38
PB0: JP2.1 U1.18 | length 1274.8
  Top Layer w10: U1.18 4707.5,4325.2 5002.4,4620 JP2.1
PB1: SW2.1 U1.19 | length 1022.9
  Top Layer w10: U1.19 4482.2,4344.8 4752.4,4615 4752.4,5060 SW2.1
PB2: JP5.14 U1.20 | length 1301.3
  Top Layer w5: JP5.14 3177.4,4550 3227.4,4600 3807.4,4600 3917.4,4490 3975.6,4490 4017.1,4448.6 4017.1,4430.3 4082.8,4364.5 U1.20
PB3: JP5.12 U1.39 | length 898.1
  Top Layer w5: JP5.12 3192.4,4500 3752.4,4500 3848.5,4403.9 U1.39
PB4: JP5.11 U1.40 | length 764.9
  Top Layer w5: JP5.11 3702.4,4450 3768.2,4384.2 U1.40
PB5: JP5.10 U1.41 | length 874.3
  Top Layer w5: JP5.10@3147.4,4345 3207.4,4405 3667.4,4405 3707.8,4364.5 U1.41
PB6: JP5.9 U1.42 | length 737.6
  Top Layer w5: JP5.9@3242.4,4344.8 U1.42
PB7: JP5.8 U1.43 | length 871.5
  Top Layer w5: JP5.8 3198.6,4306.2 3673.6,4306.2 3695.8,4328.5 3928.9,4328.5 3932.2,4325.2 U1.43
PB8: JP5.7 U1.45 | length 752.4
  Top Layer w5: JP5.7 3672.4,4250 3697.4,4275 3915.5,4275 3915.7,4275.1 3927.5,4275.1 3938.2,4285.8 U1.45
PB9: JP5.6 U1.46 | length 885.7
  Top Layer w5: JP5.6 3192.4,4200 3672.4,4200 3732.4,4260 3913.3,4260 3919.4,4266.1 U1.46
PB10: JP5.15 U1.21 | length 1182.4
  Top Layer w5: JP5.15 3833.2,4650 4099,4384.2 U1.21
PB11: JP5.16 U1.22 | length 1344
  Top Layer w5: JP5.16 3172.4,4650 3222.4,4700 3847.4,4700 3987.4,4560 3987.4,4511.7 4033.8,4465.3 4082.1,4465.3 4143.5,4403.9 U1.22
PB12: JP5.27 U1.25 | length 1647.7
  Top Layer w5: JP5.27 4062.4,5250 4255.6,5056.7 U1.25
PB13: JP5.26 U1.26 | length 1695.6
  Top Layer w5: JP5.26 3192.4,5200 4037.4,5200 4235.9,5001.4 U1.26
PB14: JP5.25 U1.27 | length 1499.2
  Top Layer w5: JP5.25 4007.4,5150 4216.3,4941.1 U1.27
PB15: JP5.24 U1.28 | length 1547.1
  Top Layer w5: JP5.24 3192.4,5100 3982.4,5100 4196.6,4885.8 U1.28
PC13: JP5.4 U1.2 | length 1060.2
  Top Layer w5: JP5.4 3192.4,4000 3687.4,4000 3819.9,4132.5 3956.4,4132.5 4033.9,4210 4048.1,4210 4058.8,4199.4 U1.2
PC14: C7.2 U1.3 X1.1 | length 306
  Top Layer w5: X1.1 3871.6,4050 C7.2 3991.8,4085 4047.4,4085 4078.5,4116.1 U1.3
PC15: C8.2 U1.4 X1.2 | length 378.1
  Top Layer w5: X1.2 3869.1,3977.5 3944.3,3977.5 3981.8,4015 4037.1,4015 4098,4076 4098,4167.6 U1.4
PF0: JP5.3 U1.5 | length 981.7
  Top Layer w5: JP5.3 3672.4,4050 3764.9,4142.5 3952.3,4142.5 4029.8,4220 4089.7,4220 4117.8,4191.9 U1.5
PF1: JP5.5 U1.6 | length 968.2
  Top Layer w5: JP5.5 3258.1,4150 3273.1,4165 3962,4165 4027,4230 4099.4,4230 4137.5,4191.9 U1.6
PF6: JP5.18 U1.35 | length 1125.6
  Top Layer w5: JP5.18 3192.4,4800 3872.4,4800 4058.8,4613.6 U1.35
PF7: JP5.17 U1.36 | length 935
  Top Layer w5: JP5.17 3852.4,4750 4039.1,4563.3 U1.36
PUMP-: D1.2 JP1.2 Q1.3 | length 480.7
  Top Layer w10: Q1.3 4253,3277.5 4258.9,3271.6 4302.4,3271.6 D1.2 4346.7,3267.2 4550.1,3267.2 JP1.2
SWCLK: JP4.4 U1.37 | length 1095
  Top Layer w5: v2(3932.4,4455) 3943.2,4444.1 3979.2,4444.1 U1.37
  Bottom Layer w10: JP4.4@3567.4,5346.3 3567.4,4875 3932.4,4510 v2(3932.4,4455)
SWDIO: JP4.2 U1.34 | length 971.6
  Top Layer w10: v2(4077.4,4550) 4078.3,4549 4078.3,4502.4 U1.34
  Bottom Layer w10: JP4.2 3767.4,4905 4077.4,4595 v2(4077.4,4550)
SYS_BAT+: C11.2 D1.1 JP1.1 R13.2 U2.3 U4.3 | length 1298.5
  Top Layer w20: U4.3@4070.3,3196 4071.9,3194.5 4071.9,3170.8 4138.7,3104 4308,3104 D1.1 ; U4.3 4070.3,3223.6 4152.4,3305.7 4152.4,3527.7 ; U2.3 4145.6,3630 4152.4,3623.2 4152.4,3527.7 ; C11.2 4199.5,3527.7 4152.4,3527.7 ; D1.1@4327.4,3113.4 4374,3160 JP1.1 4706.8,3160 R13.2
USB_5V: C9.2 Charge_LED.2 U3.4 U3.8 USB1.A9B4 USB1.B9A4 | length 1054.4
  Top Layer w10: 3356.8,3733.8 3357.4,3734.4
  Top Layer w20: USB1.A9B4 3437.4,3545.4 3437.4,3555 ; USB1.B9A4 3357.4,3734.4 3437.4,3734.4 ; C9.2 3437.4,3600.6 3437.4,3555 ; 3415.7,3635 3415.7,3647.8 3437.4,3669.4 3437.4,3734.4 ; U3.8 3482.4,3736.2 3480.6,3734.4 3437.4,3734.4 ; Charge_LED.2 3662.5,3515.1 3634.2,3515.1 3632.4,3513.3 U3.4 3630.6,3512.3 3630.6,3524.1 3599.7,3555 3437.4,3555
pads on no net: U4.1 U5.4 USB1.A6 USB1.A7 USB1.A8 USB1.B6 USB1.B7 USB1.B8

## Polygon pours and split planes (outlines as drawn)
GND on Top Layer (solid, remove dead copper, pour order 0): 3022.4,5475 5667.4,5475 5667.4,3000 3022.4,3000
GND on Bottom Layer (solid, remove dead copper, pour order 4): 3022.4,5480 5667.4,5480 5667.4,3005 3022.4,3005

## Keep-outs
Board Outline Layer:
  lines w10: 3022.4,3000 5667.4,3000 5667.4,5475 3022.4,5475 3022.4,3000

## Other copper
Top Layer:
  region net BAT+: 3622.4,3765 3687.4,3765 3687.4,3715 3622.4,3715
  text "Designed by GentleUlrica" at 4042.4,5355 h60

## Text inside footprints (layer, text, board x,y; h text height)
JP5: Top Silkscreen Layer "2" at 3162.4,3850 h40 r90; Top Silkscreen Layer "1" at 3262.4,3860 h40 r90; Top Silkscreen Layer "27" at 3262.4,5310 h40 r90; Top Silkscreen Layer "28" at 3162.4,5310 h40 r90